# Altium PCB HeatMapNodeV1.PcbDoc
Units mil, origin at the board's own origin, x right, y up, seen from the top; angles counter-clockwise.
Board outline 1650 x 1800 mil, 4 copper layers (Top Layer, Internal Layer 1, Internal Layer 2, Bottom Layer), stack 30.668 mil thick; 33 components, 30 nets, 122 pads, 34 vias.
Unrouted connection lines stored in the file: 1.
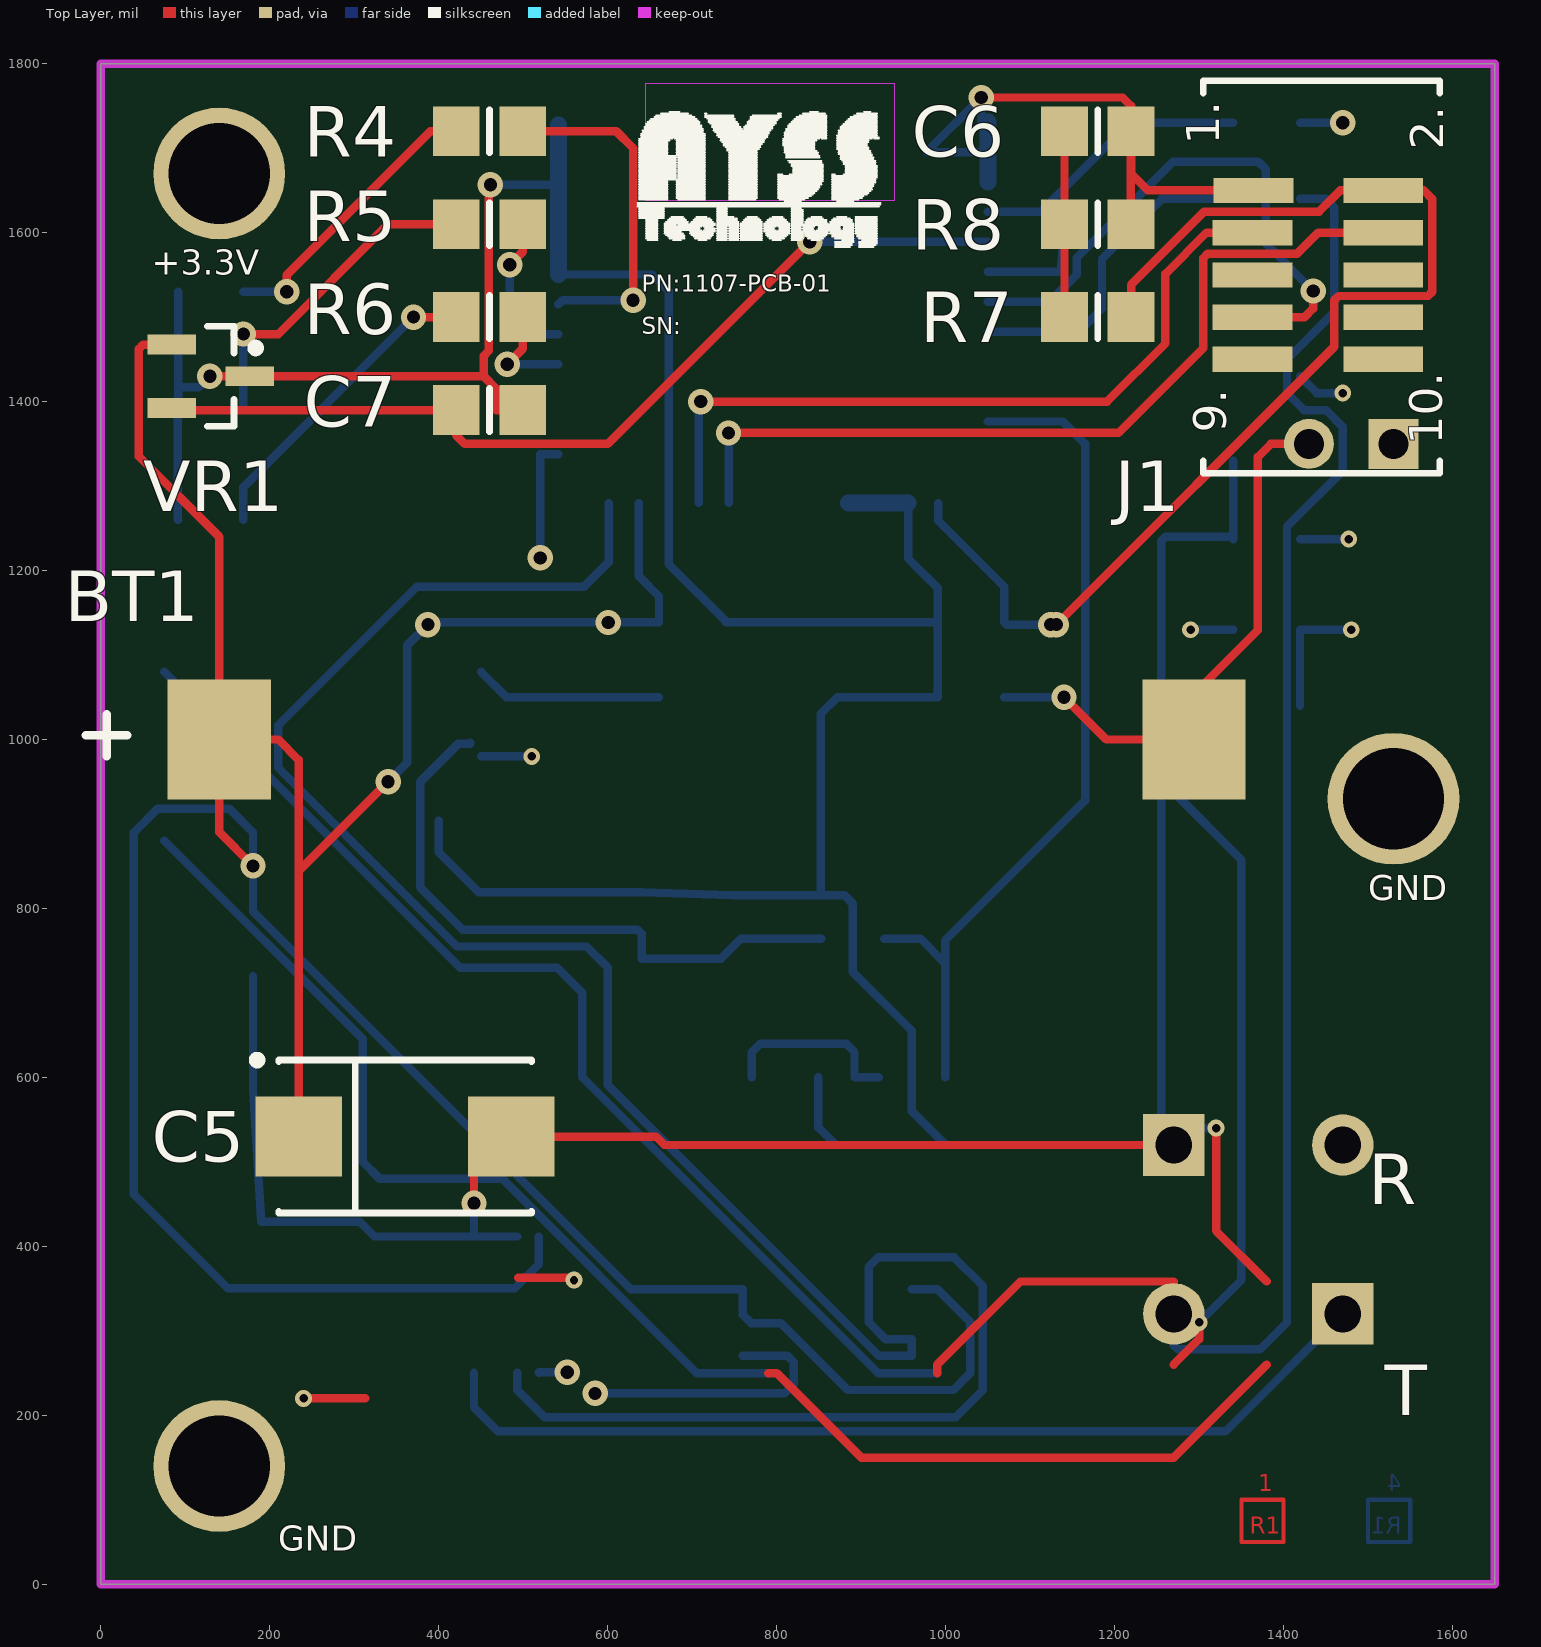
[diagram p0: Top Layer view]
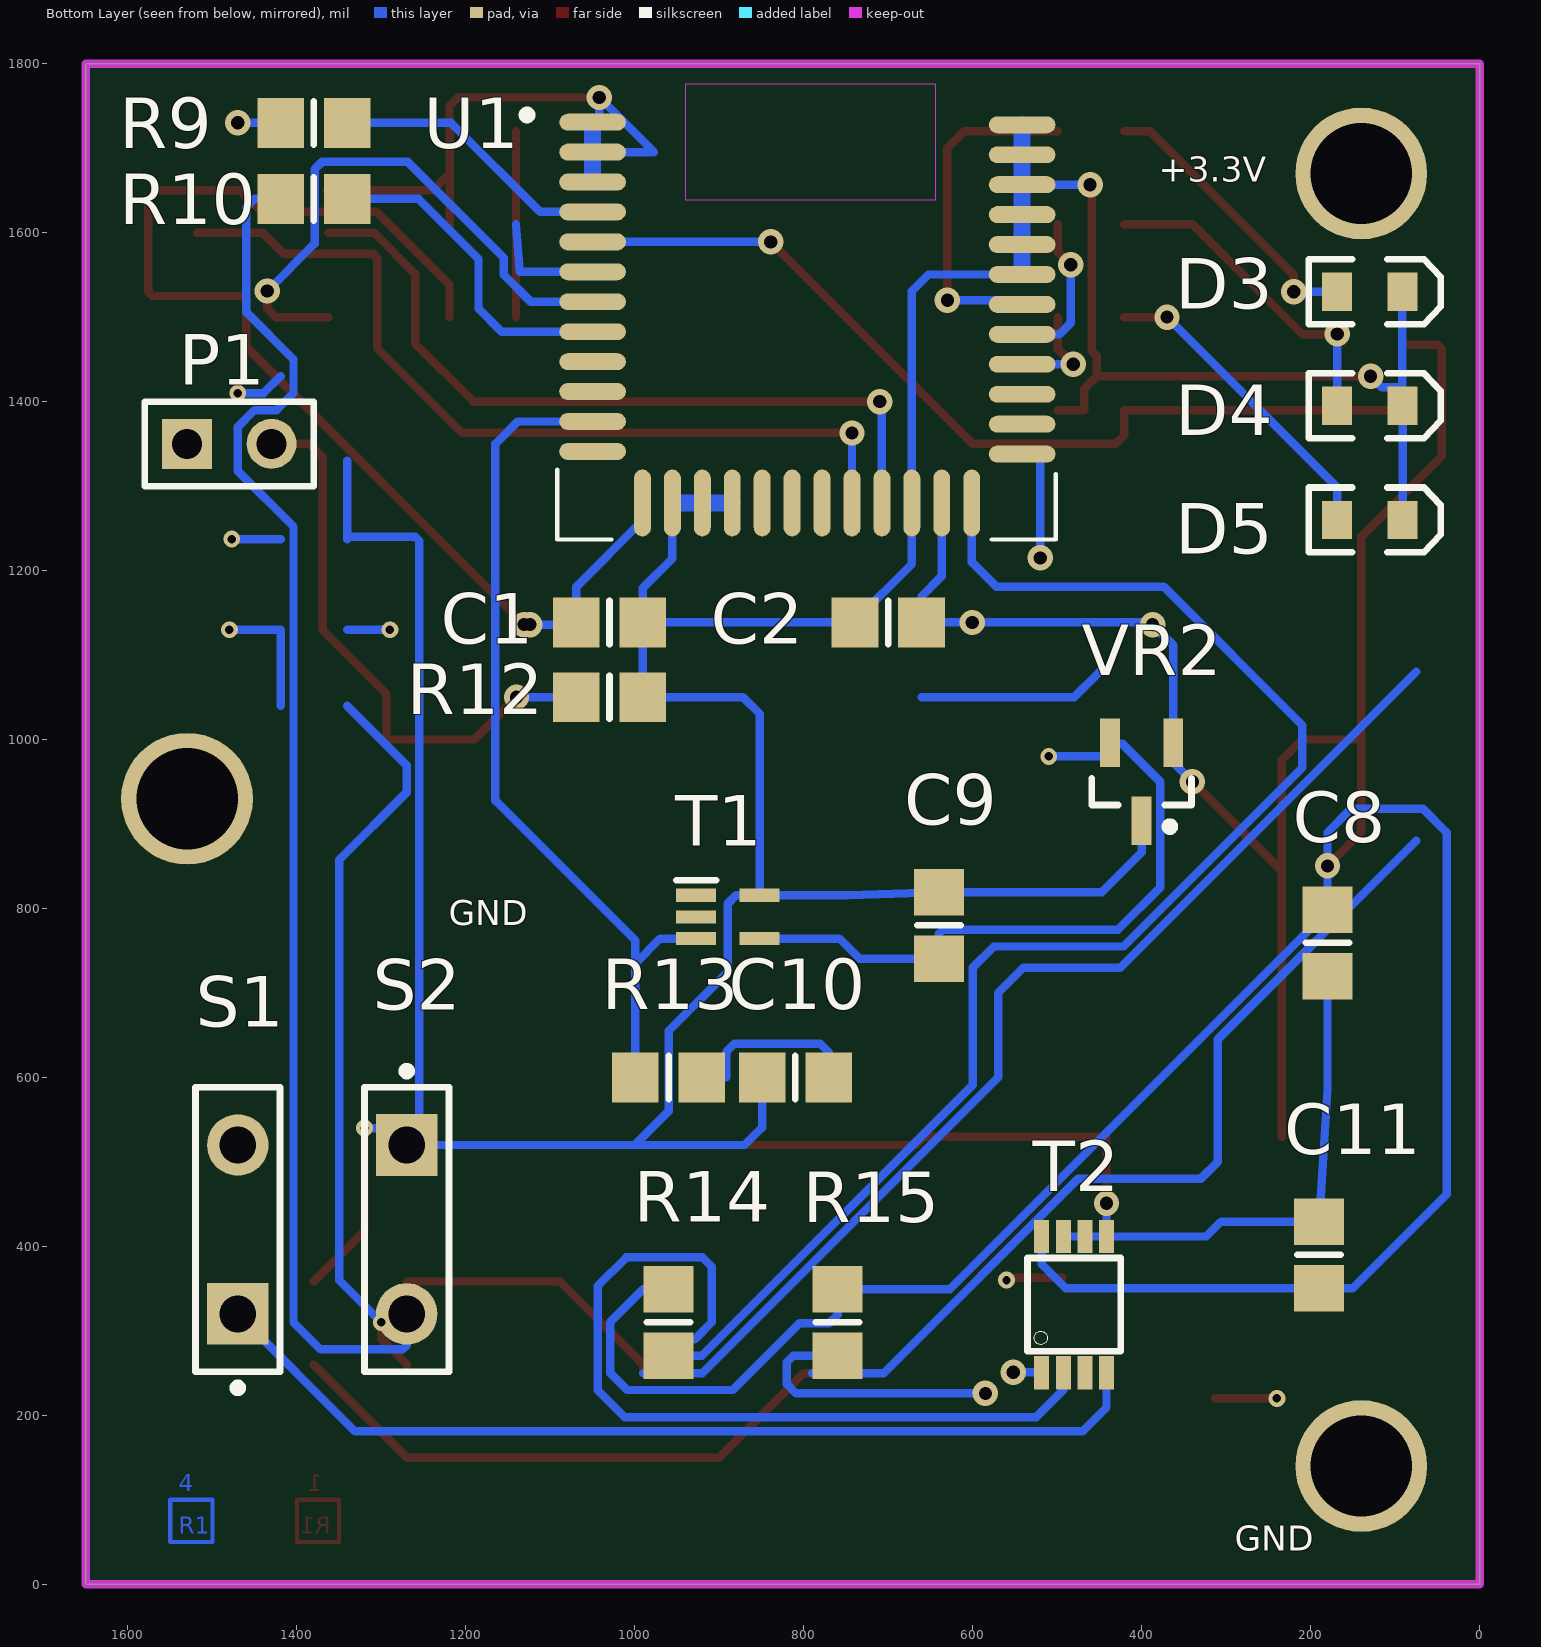
[diagram p1: Bottom Layer view, seen from below]
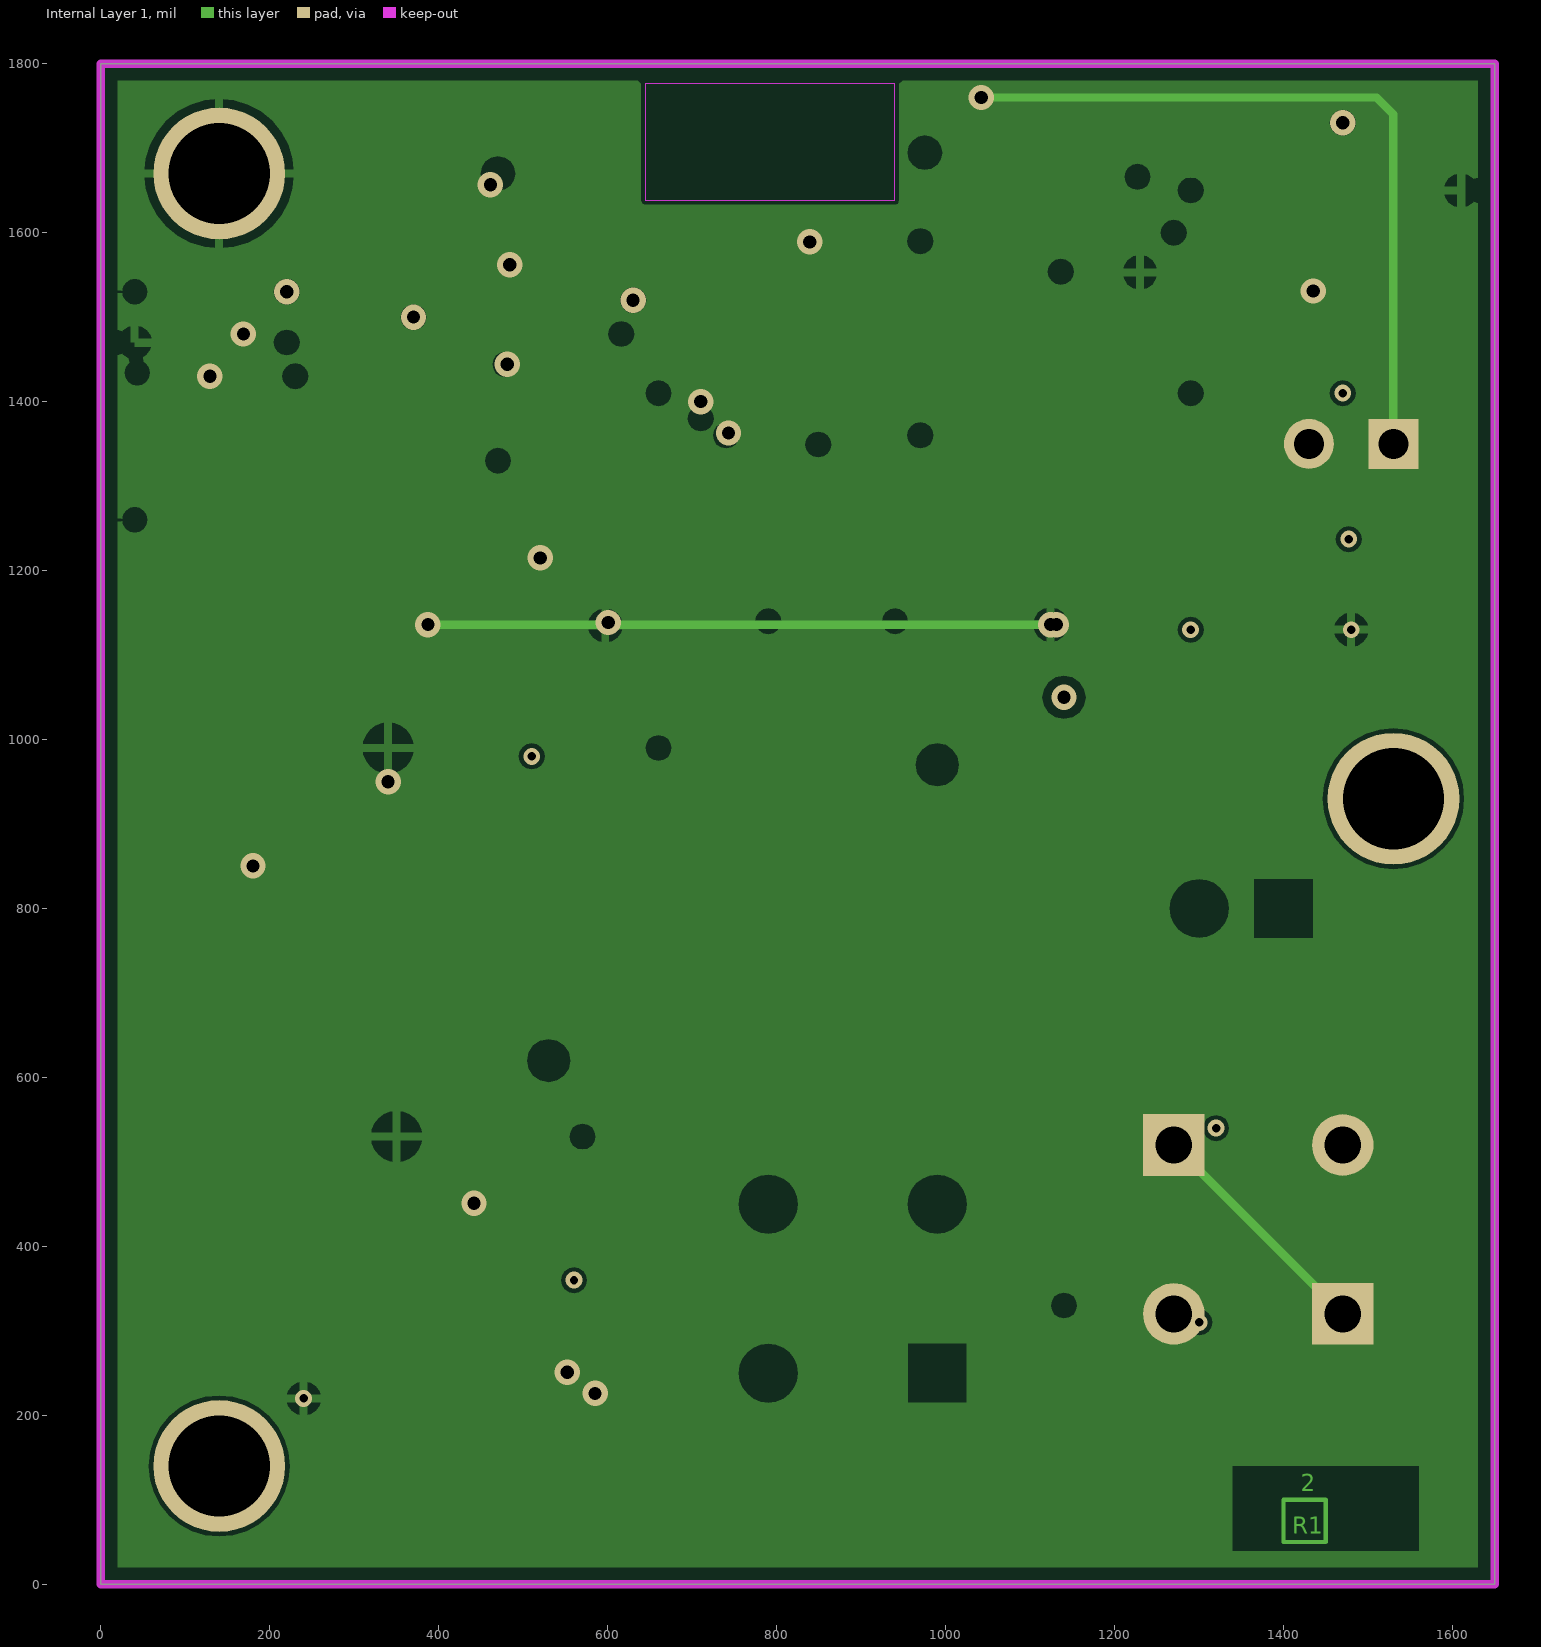
[diagram p2: Internal Layer 1]
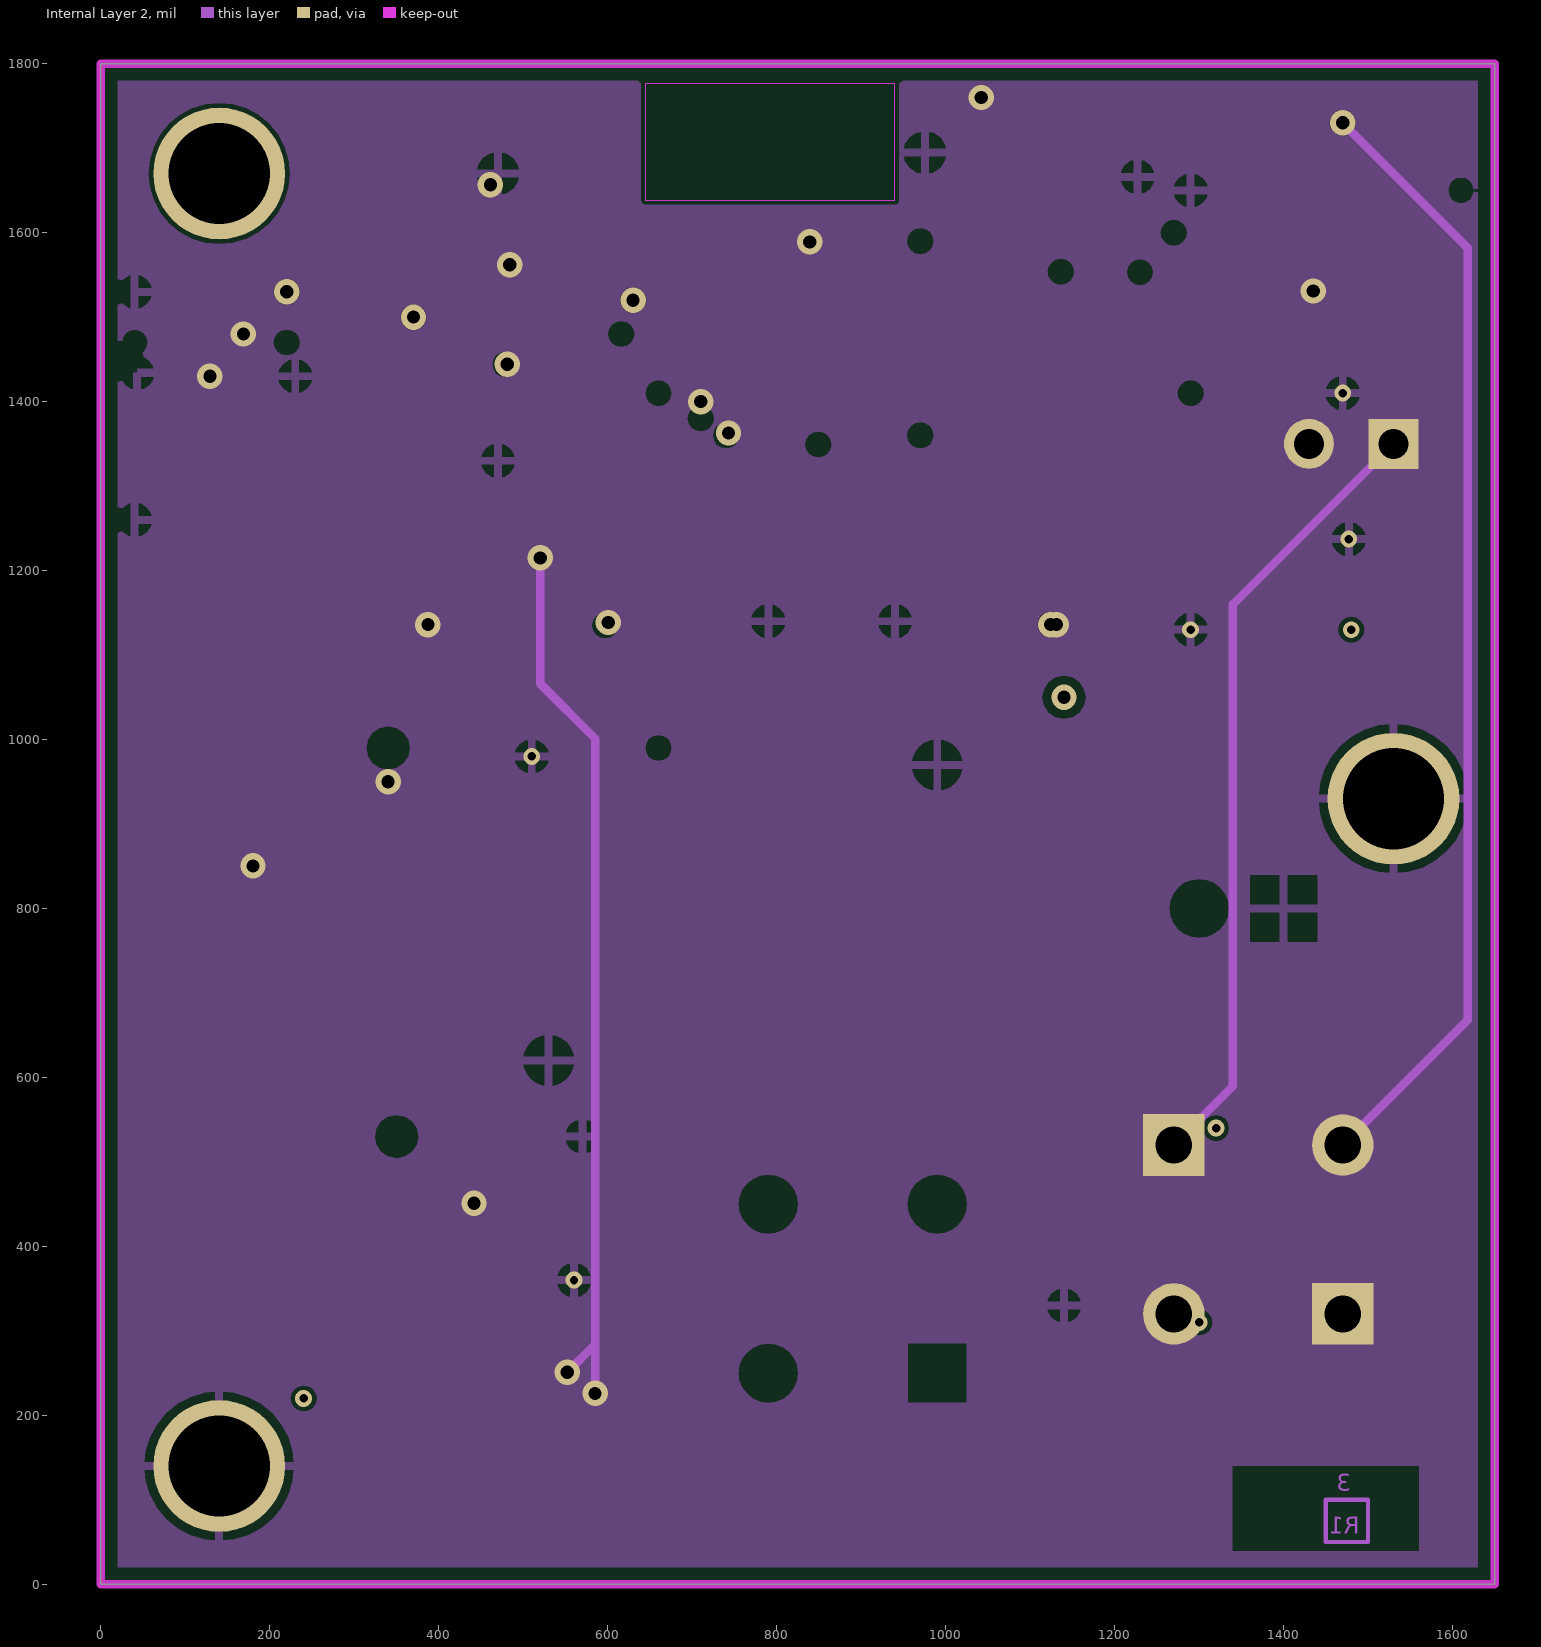
[diagram p3: Internal Layer 2]

## Layer stack, top to bottom
Top Solder: solder mask 0.4, Solder Resist, Dk 3.5
Top Layer: signal copper 1.417
Dielectric 1: core 10, FR-4, Dk 4.2
Internal Layer 1: signal copper 1.417
Dielectric 5: prepreg 5, Dk 4.2
Internal Layer 2: signal copper 1.417
Dielectric 4: core 10, Dk 4.2
Bottom Layer: signal copper 1.417
Bottom Solder: solder mask 0.4, Solder Resist, Dk 3.5

## Board outline
0,0 0,1800 1650,1800 1650,0

## Design rules (kind name [scope] priority, off if disabled: settings)
AssemblyTestPointUsage [(InNet('GND') OR InNet('VDD'))] p1 off: allowmultiple=TRUE
AssemblyTestpoint [All] p1 off: testpointundercomponent=TRUE minsize=40 maxsize=250 preferedsize=60 minholesize=0 maxholesize=150 preferedholesize=32 testpointgrid=1 usegrid=TRUE gridtolerance=0.01 allowsidetop=TRUE allowsidebottom=TRUE
Clearance [All] p1: gap=5 ignorepadtopadclearanceinfootprint=FALSE except(0: Arc-Hole Track-Hole SMDPad-Hole THPad-Hole Via-Hole Fill-Hole Poly-Hole Region-Hole Text-Hole)
DiffPairsRouting [All] p1: maxlimit=15 minlimit=5 mostfreqgap=10 toplayer_minwidth=5 toplayer_maxwidth=15 toplayer_prefwidth=10 midlayer1_minwidth=5 midlayer1_maxwidth=15 midlayer1_prefwidth=10 midlayer2_minwidth=5 midlayer2_maxwidth=15 midlayer2_prefwidth=10 bottomlayer_minwidth=5 bottomlayer_maxwidth=15 bottomlayer_prefwidth=10 maxuncoupledlength=500
FabricationTestPointUsage [(InNet('GND') OR InNet('VDD'))] p1: valid=0 allowmultiple=TRUE
FabricationTestpoint [All] p1: side=3 testpointundercomponent=TRUE minsize=40 maxsize=250 preferedsize=100 minholesize=0 maxholesize=250 preferedholesize=32 testpointgrid=1 allowsidetop=TRUE allowsidebottom=TRUE usegrid=TRUE gridtolerance=0.01
HoleSize [All] p1: absolutevalues=TRUE maxlimit=1000 minlimit=10 maxpercent=80.000 minpercent=20.000
MinimumSolderMaskSliver [All] p1: minsoldermaskwidth=5
PolygonConnect [All] p1: connectstyle=Relief reliefconductorwidth=10 reliefentries=4 polygonreliefangle="90 Angle" airgapwidth=10
RoomDefinition HeatMapNodeV1 [InComponentClass('HeatMapNodeV1')] p1: confinementstyle=ConfineIn formatcopy=TRUE lockcomponents=FALSE outline 1690,60 3670,60 3670,380 1690,380
RoutingVias [All] p1: holewidth=15.6 width=30 viastyle="Through Hole" minholewidth=10 minwidth=20 maxholewidth=31.3 maxwidth=50
SilkToSolderMaskClearance [IsPad] p1: minsilkscreentomaskgap=5 clearancetoexposedcopper=TRUE
SolderMaskExpansion "Via solder mask" [IsVia] p1: expansion=-100 // Solder mask for the vias
SolderMaskExpansion [All] p2: expansion=4
Width [All] p1: maxlimit=20 minlimit=5 preferedwidth=10
22 further rules are at their usual default settings.

## Components (designator, comment, footprint, x,y, rotation, side; value= is the part's Value field where it differs from the comment)
BT1 "1060" 1060 716.97,1000 r180 top
C1 "Cap Semi" 6-0805_M 1030,1138.57 r0 bottom value=0.10µF
C2 "Cap Semi" 6-0805_M 700,1138.57 r180 bottom value=0.10µF
C5 "Cap Pol3" D 360,530 r0 top value=100µF
C6 "Cap Semi" 6-0805_M 1180,1720 r180 top value=0.10µF
C7 "Cap Semi" 6-0805_M 460,1390 r180 top value=0.10µF
C8 "Cap Semi" 6-0805_M 180,759.37 r90 bottom value=0.10µF
C9 "Cap Semi" 6-0805_M 640,780 r270 bottom value=0.10µF
C10 "Cap Semi" 6-0805_M 810,600 r180 bottom value=1µF
C11 "Cap Semi" 6-0805_M 190,390 r270 bottom value=0.01µF
D3 "LED2" 2.0X1.25X1.2 130,1530 r180 bottom
D4 "LED2" 2.0X1.25X1.2 130,1395 r180 bottom
D5 "LED2" 2.0X1.25X1.2 130,1260 r180 bottom
J1 "Header 5X2" HDR2X5_SMD_127 1440,1550 r90 top
P1 "Header 2" HDR1X2 1530,1350 r180 bottom
R4 "Res1" 6-0805_M 460,1720 r180 top value=680
R5 "Res1" 6-0805_M 460,1610 r180 top value=680
R6 "Res1" 6-0805_M 460,1500 r180 top value=680
R7 "Res1" 6-0805_M 1180,1500 r0 top value=10K
R8 "Res1" 6-0805_M 1180,1610 r180 top value=10K
R9 "Res1" 6-0805_M 1380,1730 r0 bottom value=680
R10 "Res1" 6-0805_M 1380,1640 r0 bottom value=680
R12 "Res1" 6-0805_M 1030,1050 r180 bottom value=1k
R13 "Res1" 6-0805_M 960,600 r180 bottom value=200
R14 "Res1" 6-0805_M 960,310 r270 bottom value=10K
R15 "Res1" 6-0805_M 760,310 r270 bottom value=10K
S1 "SW-PB" SPST-2 1470,420 r90 bottom
S2 "SW-PB" SPST-2 1270,420 r270 bottom
T1 "STLM20W87F" SOT65P210X110-5N 890,790 r180 bottom
T2 "TMP75" MSOP8 480,331 r180 bottom
U1 "BLE121LR module" BLE121LR 1050,1280 r180 bottom
VR1 "Volt Reg" SOT23_M 130,1430 r0 top
VR2 "Volt Reg" SOT23_M 400,950 r270 bottom

## Footprints (in the part's own frame and the unit in brackets; to place one, negate y for a bottom-side part, rotate by r counter-clockwise, add the part's x,y. Pads: shape width x height; smd on the part's side, far side on the other; paste and mask are expansions set on the pad)
2.0X1.25X1.2 [mm] "SM LED; 2 Flat Leads"
  rect 0.9x1.15 smd: 1(-0.98,0) 2(0.98,0)
  silkscreen extent -1.83,-0.97 2.13,0.98
6-0805_M [mm] "Chip Resistor, Body 2.0x1.2mm, IPC Low Density"
  rect 1.4x1.5 smd: 1(-1,0) 2(1,0)
  silkscreen extent 0,-0.65 0,0.65, body extent -1.07,-0.7 1.07,0.7, height 0.7
1060 [mm] "SMT HOLDER FOR 2032 CELL T&R"
  rect 3.108x3.61 smd: 1(-14.655,0) 2(14.655,0)
  silkscreen extent 17.42,-0.76 18.67,0.51, body extent -15.91,-8.06 15.92,7.94, height 6.02
BLE121LR [mil]
  oval 79x20 smd: 1(0,450.79) 2(0,415.35) 3(0,379.92) 4(0,344.49) 5(0,309.05) 6(0,273.62) 7(0,238.19) 8(0,202.76) 9(0,167.32) 10(0,131.89) 11(0,96.46) 12(0,61.02) 25(508.44,57.89) 26(508.44,93.33) 27(508.44,128.76) 28(508.44,164.19) 29(508.44,199.63) 30(508.44,235.06) 31(508.44,270.49) 32(508.44,305.92) 33(508.44,341.36) 34(508.44,376.79) 35(508.44,412.22) 36(508.44,447.66)
  oval 20x79 smd: 13(59.06,0) 14(94.49,0) 15(129.92,0) 16(165.35,0) 17(200.79,0) 18(236.22,0) 19(271.65,0) 20(307.09,0) 21(342.52,0) 22(377.95,0) 23(413.39,0) 24(448.82,0)
  Multi-Layer keep-out region: 110.24,496.06 405.51,496.06 405.51,358.26 110.24,358.26
  silkscreen extent -83,-43 548,464, body extent -30,-31 539,500, height 71
D [mm] "Capacitor, SM Tantalum; Body 7.3 x 4.3 mm (LxW typ)"
  rect 2.6x2.4 smd: 1(-3.2,0) 2(3.2,0)
  silkscreen extent -4.57,-2.3 3.8,2.42
HDR1X2 [mm] "Connector; Header; 2 Position"
  rect 1.5x1.5 hole 0.9: 1(0,0)
  round 1.5 hole 0.9: 2(2.54,0)
  silkscreen extent -1.27,-1.27 3.81,1.27
HDR2X5_SMD_127 [mm] "10 Positions Header, Shrouded Connector 0.050\" (1.27mm) Surface Mount Gold"
  rect 0.76x2.4 smd: 1(2.54,1.919) 2(2.54,-1.981) 3(1.27,1.956) 4(1.27,-1.981) 5(0,1.956) 6(0,-1.981) 7(-1.27,1.956) 8(-1.27,-1.981) 9(-2.54,1.956) 10(-2.54,-1.981)
  silkscreen extent -5.97,-3.68 5.84,3.43, body extent -5.46,-2.41 5.44,2.54, height 5.4
MSOP8 [mm]
  rect 0.45x1 smd: 1(-0.975,-2.05) 2(-0.325,-2.05) 3(0.325,-2.05) 4(0.975,-2.05) 5(0.975,2.05) 6(0.325,2.05) 7(-0.325,2.05) 8(-0.975,2.05)
  silkscreen extent -1.4,-1.4 1.4,1.4
SOT23_M [mm] "SOT23, 3-Leads, Body 2.9x1.3mm, Pitch 0.95mm, Lead Span 2.3mm - Reverse Pinning, IPC Low Density"
  rect 1.45x0.6 smd: 1(1.175,0) 2(-1.175,-0.95) 3(-1.175,0.95)
  silkscreen extent -0.1,-1.5 1.48,1.5, body extent -0.7,-1.5 0.7,1.5, height 1.1
SOT65P210X110-5N [mm]
  rect 1.2x0.4 smd: 1(-0.95,0.65) 2(-0.95,0) 3(-0.95,-0.65) 4(0.95,-0.65) 5(0.95,0.65)
  silkscreen extent -1.55,1.1 -0.35,1.1
SPST-2 [mm] "Switch; 2 Leads"
  rect 1.85x1.85 hole 1.1: 1(-2.54,0)
  round 1.85 hole 1.1: 2(2.54,0)
  silkscreen extent -4.89,-1.27 4.28,1.27

## Part data
BT1: library part Battery, "Coin Cell Battery 2032 Holder", Manufacturer="Keystone Electronics", Operating Temperature="-50°C ~ 145°C", Supplier Part Number 1=36-1060-ND, Battery Cell Size="Coin, 20.0mm", Battery Series=2032, Battery Type, Function="Coin Cell, Holder", Category="Battery Products", ComponentLink1Description=http://www.keyelco.com/product-pdf.cfm?p=726, ComponentLink1URL=http://www.keyelco.com/product-pdf.cfm?p=726, Height Above Board="0.217\" (5.50mm)", Manufacturer Part Number=1060, Mounting Type="PCB, Surface Mount", Number of Cells=1, Part Status=Active, Pricing 1="1=1.79, 10=1.475, 50=1.3244, 100=1.2642, 250=1.1438, 500=1.0535, 1000=1.01202, 2500=0.903, 5000=0.80066 (USD)", RoHS="RoHS Compliant", Stock 1=5034, Style="Holder (Open)", Supplier 1=Digi-Key, Termination Style="SMD (SMT) Tab"
C1 C2 C6 C7 C8 C9 C10 C11: "Capacitor (Semiconductor SIM Model)", Capacitance=0.10µF, Manufacturer="Taiyo Yuden", Manufacturer Part Number=HMK212B7104KG-T, Operating Temperature="-55°C ~ 125°C", Package / Case="0805 (2012 Metric)", Ratings=-, Supplier Part Number 1=587-1276-1-ND, Temperature Coefficient=X7R, Tolerance=±10%, Voltage - Rated=100V, Applications="General Purpose", Category=Capacitors, ComponentLink1Description=http://ds.yuden.co.jp/TYCOMPAS/ut/detail.do?productNo=HMK212B7104KG-T&fileName=HMK212B7104KG-T_SS&mode=specSheetDownload, ComponentLink1URL=http://ds.yuden.co.jp/TYCOMPAS/ut/detail.do?productNo=HMK212B7104KG-T&fileName=HMK212B7104KG-T_SS&mode=specSheetDownload, Features="High Voltage", Height - Seated (Max)=-, LatestRevisionDate=29-May-2009, LatestRevisionNote="IPC-7351 Footprint Added.", Lead Spacing=-, Lead Style=-, Mounting Type="Surface Mount, MLCC", PackageDescription="Chip Capacitor", Packaging="Cut Tape (CT)", Part Status=Active, Pricing 1="1=0.19, 10=0.128, 25=0.0936, 50=0.0766, 100=0.0647, 250=0.05276, 500=0.04426, 1000=0.03915 (USD)", Published=8-Jun-2000, Publisher="Altium Limited", RoHS="RoHS Compliant", Size / Dimension="0.079\" L x 0.049\" W (2.00mm x 1.25mm)", Stock 1=4553, Supplier 1=Digi-Key, Thickness (Max)="0.053\" (1.35mm)"
C5: "Polarized Capacitor (Surface Mount)", Capacitance=100µF, ESR (Equivalent Series Resistance)="125 mOhm", Lifetime @ Temp.="2000 Hrs @ 85°C", Manufacturer=KEMET, Manufacturer Part Number=T495D107K016ATE125, Manufacturer Size Code=D, Operating Temperature="-55°C ~ 125°C", Package / Case="2917 (7343 Metric)", Supplier Part Number 1=399-8499-1-ND, Tolerance=±10%, Voltage - Rated=16V, Category=Capacitors, ComponentLink1Description=http://www.kemet.com/docfinder?Partnumber=T495D107K016ATE125, ComponentLink1URL=http://www.kemet.com/docfinder?Partnumber=T495D107K016ATE125, Failure Rate=-, Features="General Purpose", Height - Seated (Max)="0.122\" (3.10mm)", LatestRevisionDate=29-May-2009, LatestRevisionNote="IPC-7351 Footprint Added.", Lead Spacing=-, Mounting Type="Surface Mount", PackageDescription="Chip Capacitor", PackageReference=C0805, Packaging="Cut Tape (CT)", Part Status=Active, Pricing 1="1=1.37, 10=1.084, 25=0.9936, 50=0.9394, 100=0.8129, 250=0.72264 (USD)", Published=8-Jun-2000, Publisher="Altium Limited", RoHS="RoHS Compliant", Size / Dimension="0.287\" L x 0.169\" W (7.30mm x 4.30mm)", Stock 1=19470, Supplier 1=Digi-Key, Type=Molded
D3: "Typical RED, GREEN, YELLOW, AMBER GaAs LED", Color=Green, Current - Test=20mA, Manufacturer="Visual Communications Company - VCC", Manufacturer Part Number=CMD17-21VGD/TR8, Millicandela Rating=7mcd, Package / Case="0805 (2012 Metric)", Supplier Device Package=0805, Supplier Part Number 1=L62505CT-ND, Voltage - Forward (Vf) (Typ)=2.1V, Category=Optoelectronics, ComponentLink1Description=http://vcclite.com/_pdf/CMD17-21%20Series%20SMT%20LEDs%200805%20Package%20Size.pdf, ComponentLink1URL=http://vcclite.com/_pdf/CMD17-21%20Series%20SMT%20LEDs%200805%20Package%20Size.pdf, Features=-, Height (Max)=1.20mm, Lens Color=Green, Lens Style/Size="Rectangle with Flat Top, 1.40mm x 1.25mm", Lens Transparency=Diffused, Mounting Type="Surface Mount", Packaging="Cut Tape (CT)", Part Status=Active, Pricing 1="1=0.5, 10=0.364, 25=0.2972, 100=0.2376, 250=0.20048, 500=0.17078, 1000=0.13365 (USD)", RoHS="RoHS Compliant", Size / Dimension="2.00mm L x 1.25mm W", Stock 1=21325, Supplier 1=Digi-Key, Viewing Angle=140°, Wavelength - Dominant=-, Wavelength - Peak=570nm
D4: "Typical RED, GREEN, YELLOW, AMBER GaAs LED", Color=Red, Current - Test=20mA, Manufacturer="Visual Communications Company - VCC", Manufacturer Part Number=CMD17-21VRD/TR8, Millicandela Rating=6mcd, Package / Case="0805 (2012 Metric)", Supplier Device Package=0805, Supplier Part Number 1=L62501CT-ND, Voltage - Forward (Vf) (Typ)=2V, Category=Optoelectronics, ComponentLink1Description=http://vcclite.com/_pdf/CMD17-21%20Series%20SMT%20LEDs%200805%20Package%20Size.pdf, ComponentLink1URL=http://vcclite.com/_pdf/CMD17-21%20Series%20SMT%20LEDs%200805%20Package%20Size.pdf, Features=-, Height (Max)=1.20mm, Lens Color=Red, Lens Style/Size="Rectangle with Flat Top, 1.40mm x 1.25mm", Lens Transparency=Diffused, Mounting Type="Surface Mount", Packaging="Cut Tape (CT)", Part Status=Active, Pricing 1="1=0.54, 10=0.388, 25=0.3168, 100=0.2534, 250=0.21384, 500=0.18216, 1000=0.14256 (USD)", RoHS="RoHS Compliant", Size / Dimension="2.00mm L x 1.25mm W", Stock 1=24797, Supplier 1=Digi-Key, Viewing Angle=140°, Wavelength - Dominant=-, Wavelength - Peak=640nm
D5: "Typical RED, GREEN, YELLOW, AMBER GaAs LED", Color=Yellow, Current - Test=20mA, Manufacturer="Visual Communications Company - VCC", Manufacturer Part Number=CMD17-21VYD/TR8, Millicandela Rating=4mcd, Package / Case="0805 (2012 Metric)", Supplier Device Package=0805, Supplier Part Number 1=L62507CT-ND, Voltage - Forward (Vf) (Typ)=2V, Category=Optoelectronics, ComponentLink1Description=http://vcclite.com/_pdf/CMD17-21%20Series%20SMT%20LEDs%200805%20Package%20Size.pdf, ComponentLink1URL=http://vcclite.com/_pdf/CMD17-21%20Series%20SMT%20LEDs%200805%20Package%20Size.pdf, Features=-, Height (Max)=1.20mm, Lens Color=Yellow, Lens Style/Size="Rectangle with Flat Top, 1.40mm x 1.25mm", Lens Transparency=Diffused, Mounting Type="Surface Mount", Packaging="Cut Tape (CT)", Part Status=Active, Pricing 1="1=0.61, 10=0.437, 25=0.3564, 100=0.2851, 250=0.24056, 500=0.20494, 1000=0.16038 (USD)", RoHS="RoHS Compliant", Size / Dimension="2.00mm L x 1.25mm W", Stock 1=10342, Supplier 1=Digi-Key, Viewing Angle=140°, Wavelength - Dominant=-, Wavelength - Peak=585nm
J1: "Header, 5-Pin, Dual row", Color=Black, Manufacturer="Amphenol FCI", Manufacturer Part Number=20021521-00010T1LF, Supplier Part Number 1=609-4054-ND, Category="Connectors, Interconnects", ComponentLink1Description=http://portal.fciconnect.com/Comergent//fci/drawing/20021521.pdf, ComponentLink1URL=http://portal.fciconnect.com/Comergent//fci/drawing/20021521.pdf, Connector Type="Header, Shrouded", Contact Finish=Gold, Contact Finish Thickness=Flash, Contact Mating Length=-, Contact Type="Male Pin", Fastening Type=-, Features=-, LatestRevisionDate=17-Jul-2002, LatestRevisionNote="Re-released for DXP Platform.", Mounting Type="Surface Mount", Number of Positions=10, Number of Positions Loaded=All, Number of Rows=2, Packaging=Tube, Part Status=Active, Pitch="0.050\" (1.27mm)", Pricing 1="1=1.11, 10=0.973, 100=0.8393, 500=0.6867, 1000=0.6104, 5000=0.5341, 10000=0.5074 (USD)", Publisher="Altium Limited", RoHS="RoHS Compliant", Row Spacing="0.050\" (1.27mm)", Stock 1=34633, Supplier 1=Digi-Key, Termination=Solder
P1: "Header, 2-Pin"
R4 R5 R6 R9 R10 R13 R14 R15: "Resistor", Manufacturer="Vishay Dale", Manufacturer Part Number=CRCW0805680RFKEA, Operating Temperature="-55°C ~ 155°C", Package / Case="0805 (2012 Metric)", Power (Watts)="0.125W, 1/8W", Resistance (Ohms)=680, Supplier Device Package=0805, Supplier Part Number 1=541-680CCT-ND, Temperature Coefficient=±100ppm/°C, Tolerance=±1%, Category=Resistors, ComponentLink1Description=http://www.vishay.com/docs/20035/dcrcwe3.pdf, ComponentLink1URL=http://www.vishay.com/docs/20035/dcrcwe3.pdf, Composition="Thick Film", Failure Rate=-, Features="Automotive AEC-Q200", Height - Seated (Max)="0.020\" (0.50mm)", Number of Terminations=2, Packaging="Cut Tape (CT)", Part Status=Active, Pricing 1="1=0.1, 10=0.04, 25=0.0288, 50=0.022, 100=0.0162, 250=0.01236, 500=0.0099, 1000=0.00729 (USD)", RoHS="RoHS Compliant", Size / Dimension="0.079\" L x 0.049\" W (2.00mm x 1.25mm)", Stock 1=37773, Supplier 1=Digi-Key
R7 R8: "Resistor", Manufacturer="Vishay Dale", Manufacturer Part Number=CRCW080510K0FKEA, Operating Temperature="-55°C ~ 155°C", Package / Case="0805 (2012 Metric)", Power (Watts)="0.125W, 1/8W", Resistance (Ohms)=10k, Supplier Device Package=0805, Supplier Part Number 1=541-10.0KCCT-ND, Temperature Coefficient=±100ppm/°C, Tolerance=±1%, Category=Resistors, ComponentLink1Description=http://www.vishay.com/docs/20035/dcrcwe3.pdf, ComponentLink1URL=http://www.vishay.com/docs/20035/dcrcwe3.pdf, Composition="Thick Film", Failure Rate=-, Features="Automotive AEC-Q200", Height - Seated (Max)="0.020\" (0.50mm)", Number of Terminations=2, Packaging="Cut Tape (CT)", Part Status=Active, Pricing 1="1=0.1, 10=0.04, 25=0.0288, 50=0.022, 100=0.0162, 250=0.01236, 500=0.0099, 1000=0.00729 (USD)", RoHS="RoHS Compliant", Size / Dimension="0.079\" L x 0.049\" W (2.00mm x 1.25mm)", Stock 1=531677, Supplier 1=Digi-Key
R12: "Resistor", Manufacturer="Vishay Dale", Manufacturer Part Number=CRCW08050000Z0EA, Operating Temperature="-55°C ~ 155°C", Package / Case="0805 (2012 Metric)", Power (Watts)="0.125W, 1/8W", Resistance (Ohms)=0.0, Supplier Device Package=0805, Supplier Part Number 1=541-0.0ACT-ND, Temperature Coefficient=-, Tolerance=Jumper, Category=Resistors, ComponentLink1Description=http://www.vishay.com/docs/20035/dcrcwe3.pdf, ComponentLink1URL=http://www.vishay.com/docs/20035/dcrcwe3.pdf, Composition="Thick Film", Failure Rate=-, Features="Automotive AEC-Q200", Height - Seated (Max)="0.020\" (0.50mm)", Packaging="Cut Tape (CT)", Part Status=Active, Pricing 1="1=0.1, 10=0.026, 25=0.0184, 50=0.014, 100=0.0104, 250=0.00792, 500=0.00634, 1000=0.00466 (USD)", RoHS="RoHS Compliant", Size / Dimension="0.079\" L x 0.049\" W (2.00mm x 1.25mm)", Stock 1=1246099, Supplier 1=Digi-Key
S1 S2: "Switch", LatestRevisionDate=17-Jul-2002, LatestRevisionNote="Re-released for DXP Platform.", PackageDescription="Switch; 2 Leads", PackageReference=SPST-2, Published=24-Mar-1999, Publisher="Altium Limited"
T1: "STLM20W87F, Temperature Sensor 1.5C 2.4 to 5.5V 5-Pin SOT-323", Manufacturer_Name=STMicroelectronics, RS Part Number=1685835, Allied_Number=70390883, Allied Price/Stock=http://www.alliedelec.com/stmicroelectronics-stlm20w87f/70390883/, Arrow Part Number=STLM20W87F, Arrow Price/Stock=https://www.arrow.com/en/products/stlm20w87f/stmicroelectronics, Datasheet Link=http://www.st.com/st-web-ui/static/active/en/resource/technical/document/datasheet/CD00119601.pdf, Geometry.Height=1.1mm, Manufacturer_Part_Number=STLM20W87F, RS Price/Stock=http://uk.rs-online.com/web/p/products/1685835
T2: "the tmp175 and tmp75 are two-wire serial output temperature sensors available in so-8 and msop-8 packages. requiring ...", Package=None, Availability=Unavailable, MF="Texas Instruments", MP=TMP75, Price=None, SnapEDA_Link=https://www.snapeda.com/parts/TMP75/Texas%2520Instruments/view-part/?ref=snap
U1: library part BLE121LR, "Bluetooth Low Energy (BLE) module", Current - Receiving="28mA ~ 33mA", Current - Transmitting="25mA ~ 39mA", Frequency=2.4GHz, Manufacturer="Silicon Labs", Manufacturer Part Number=BLE121LR-A-M256K, Operating Temperature="-40°C ~ 85°C", Package / Case=Module, Power - Output=8dBm, Supplier Part Number 1=1446-1039-1-ND, Voltage - Supply="2 V ~ 3.6 V", Antenna Type="Integrated, Chip", Category="RF/IF and RFID", ComponentLink1Description=http://media.digikey.com/pdf/Data%20Sheets/BlueGiga%20PDFs/BLE121LR_V1.2.pdf, ComponentLink1URL=http://media.digikey.com/pdf/Data%20Sheets/BlueGiga%20PDFs/BLE121LR_V1.2.pdf, Data Rate=2Mbps, Memory Size="256kB Flash,  8kB SRAM", Modulation=-, Mounting Type="Surface Mount", Packaging="Cut Tape (CT)", Part Status=Active, Pricing 1="1=13.65, 10=12.346, 25=11.3712, 100=10.3965, 250=9.74672, 500=9.09692 (USD)", Protocol="Bluetooth v4.0", RF Family/Standard=Bluetooth, RoHS="RoHS Compliant", Sensitivity=-98dBm, Serial Interfaces="I²C, SPI, UART", Stock 1=4848, Supplier 1=Digi-Key
VR1 VR2: "Voltage Regulator", Current - Cathode=-, Current - Output=5mA, Current - Supply=8.5µA, Manufacturer="Texas Instruments", Manufacturer Part Number=REF3312AIDBZT, Operating Temperature="-40°C ~ 125°C (TA)", Package / Case="TO-236-3, SC-59, SOT-23-3", Supplier Device Package=SOT-23-3, Supplier Part Number 1=296-22635-1-ND, Temperature Coefficient=30ppm/°C, Tolerance=±0.15%, Voltage - Input="1.8 V ~ 5.5 V", Voltage - Output (Min/Fixed)=1.25V, Category="Integrated Circuits (ICs)", ComponentLink1Description=http://www.ti.com/lit/ds/symlink/ref3312.pdf, ComponentLink1URL=http://www.ti.com/lit/ds/symlink/ref3312.pdf, Mounting Type="Surface Mount", Noise - 0.1Hz to 10Hz=35µVp-p, Noise - 10Hz to 10kHz=-, Output Type=Fixed, Packaging="Cut Tape (CT)", Part Status=Active, Pricing 1="1=2.14, 10=1.922, 100=1.5418 (USD)", Reference Type=Series, RoHS="RoHS Compliant", Stock 1=5482, Supplier 1=Digi-Key, Voltage - Output (Max)=-

## Free pads (board coordinates)
  round 156 hole 120: 0(140,140) 0(140,1670) 0(1530,930)

## Via types
v1: diameter 30, hole 15.6, Top Layer to Bottom Layer, 25 vias
v2: diameter 20, hole 10, Top Layer to Bottom Layer, 9 vias

## Nets (pads, with @x,y where several pads share a name; then routed paths per layer and width w, separated by ;. In a path a pad name is that pad's centre, name@x,y a point inside that pad or via, vN(x,y) a via of type N, cw(c..) or ccw(c..) an arc to the next point about the centre after c; other vN are vias at no path point)
DCDC: U1.18
GND: C1.1 C2.1 C5.2 C6.1 C7.1 C8.1 C9.1 C10.1 C11.1 D3.2 D4.2 D5.2 J1.1 P1.1 R8.1 R12.2 S1.1 S2.1 T1.5 T2.4 T2.5 T2.6 T2.7 U1.1 U1.2 U1.3 U1.14 U1.15 U1.16 U1.22 U1.31 U1.32 U1.33 U1.34 U1.35 U1.36 VR1.1 VR2.1 | length 9655.6
  Top Layer w10: v1(129,1430) VR1.1 453.19,1430 ; v1(441.61,451) 441.61,530 C5.2 657,530 667,520 S2.1 ; v1(461,1656.79) 459,1654.79 459,1460 453.19,1454.19 453.19,1430 ; C7.1 468.19,1390 468.19,1415 453.19,1430 ; v1(1042,1760) 1209.37,1760 1219.37,1750 C6.1 ; R8.1 1219,1610 1219,1720 C6.1 ; J1.1 1239.37,1650 1219.37,1670 C6.1
  Internal Layer 2 w10: S2.1 1340,590 1340,1160 P1.1
  Internal Layer 1 w10: v1(1042,1760) 1510,1760 1530,1740 P1.1 ; S2.1 S1.1
  Bottom Layer w10: D5.2 91,1260 91,1389.58 91.42,1390 D4.2 D4.2@91.42,1417 ; D3.2 D4.2@91.42,1417 ; v1(129,1430) 116,1417 D4.2@91.42,1417 ; C8.1 180,585 C11.1 306,429.37 323.66,411.71 T2.5 ; VR2.1 400,866.34 446.97,819.37 C9.1 747.78,815.59 T1.5@852,815.59 ; T2.4 441.61,209.39 470,181 1331,181 S1.1 ; v1(441.61,451) T2.5 ; v1(461,1656.79) U1.34 ; T2.7 T2.6 T2.5 ; U1.31 652.51,1550.49 672.05,1530.95 U1.22 672.05,1207.95 739.37,1140.63 C2.1 C1.1 ; C10.1 849.37,540.63 870,520 1000,520 ; U1.14 955.51,1214.49 990.63,1179.37 C1.1 ; U1.2 977.35,1695.35 v1(1042,1760) 1042,1730.79 U1.1 ; S2.1 1000,520 ; T1.5@852,815.59 852,1030 872,1050 R12.2 C1.1 ; T1.5@852,815.59 T1.5 880,815.59 890,805.59 890,725 960,655 960,560 1000,520
  Bottom Layer w20: U1.31 U1.32 U1.33 U1.34 U1.35 U1.36 ; U1.16 U1.15 U1.14 ; U1.3 U1.2 U1.1
NetBT1_1: BT1.1 P1.2 R12.1 | length 678
  Top Layer w10: v1(1140,1050) 1190,1000 BT1.1 1293.94,1054 1369.56,1129.63 1369.56,1334.56 1385,1350 P1.2
  Bottom Layer w10: R12.1 v1(1140,1050)
NetC9_2: C9.2 T1.4 VR2.2 | length 740.9
  Bottom Layer w10: VR2.2 437.4,995 423,995 378,950 378,825 428,775 635,775 640,770 C9.2 734,740.63 757.78,764.41 T1.4
NetC10_2: C10.2 R13.2 | length 218.3
  Bottom Layer w10: C10.2 770.63,630 780.63,640 882,640 892,630 892,600 R13.2
NetD3_1: D3.1 R4.2 | length 342.5
  Top Layer w10: v1(220,1530) 220,1550 390,1720 R4.2
  Bottom Layer w10: D3.1 v1(220,1530)
NetD4_1: D4.1 R5.2 | length 390.9
  Top Layer w10: v1(168.58,1480) 210,1480 340,1610 R5.2
  Bottom Layer w10: D4.1 v1(168.58,1480)
NetD5_1: D5.1 R6.2 | length 374.1
  Top Layer w10: v1(370,1500) R6.2
  Bottom Layer w10: D5.1 168.58,1298.58 v1(370,1500)
NetR9_2: R9.2 S1.2 | length 1383.2
  Internal Layer 2 w10: S1.2 1618,668 1618,1582 v1(1470,1730)
  Bottom Layer w10: R9.2 v1(1470,1730)
NetR10_2: R10.2 S2.2 | length 1644.2
  Bottom Layer w10: S2.2 1270,283 1275,278 1372,278 1404,310 1404,1252 1470,1318 1470,1370 1450,1390 1424,1390 1404,1410 1404,1450 1460,1506 1460,1630 1450,1640 R10.2
P0_0: C6.2 R7.1 R8.2 U1.6 | length 362.9
  Top Layer w10: R7.1 R8.2 C6.2
  Bottom Layer w10: U1.6 1136.38,1553.62 1140.63,1610
P0_1: C7.2 U1.5 VR1.2 | length 1100.5
  Top Layer w10: VR1.2 86.34,1390 C7.2 420.63,1360 430.63,1350 600,1350 v1(839.05,1589.05)
  Bottom Layer w10: v1(839.05,1589.05) U1.5
P0_2: R9.1 U1.4 | length 334.3
  Bottom Layer w10: U1.4 1112,1624.49 1217.51,1730 R9.1
P0_3: R10.1 U1.8 | length 390.3
  Bottom Layer w10: U1.8 1157.76,1482.76 1185,1510 1185,1569 1256,1640 R10.1
P0_4: U1.9
P0_5: U1.10
P0_6: R13.1 T1.3 U1.11 | length 1028.7
  Bottom Layer w10: T1.3 970,764.41 999.37,735.04 ; R13.1 999.37,735.04 ; U1.11 1138.54,1376.46 1165,1350 1165,927.63 999.37,762 999.37,735.04
P0_7: U1.12
P1_2: R4.1 U1.30 | length 409.4
  Top Layer w10: R4.1 610,1720 630,1700 v1(630,1520)
  Bottom Layer w10: U1.30 546.5,1520 v1(630,1520)
P1_3: R5.1 U1.29 | length 186.5
  Top Layer w10: v1(484,1562) 499.37,1577.37 R5.1
  Bottom Layer w10: v1(484,1562) 484,1493 497.37,1479.63 U1.29
P1_4: R6.1 U1.28 | length 124
  Top Layer w10: v1(481,1444.19) 499.37,1462.56 R6.1
  Bottom Layer w10: v1(481,1444.19) U1.28
P1_5: U1.27
P1_6: U1.17
P2_0: U1.19
P2_1/PROG_DD: J1.4 U1.20 | length 1018.6
  Top Layer w10: v1(742.91,1362.91) 1204.54,1362.91 1305.04,1463.41 1305.04,1570 1310.08,1575.04 1416.04,1575.04 1441,1600 J1.4
  Bottom Layer w10: U1.20 v1(742.91,1362.91)
P2_2/PROG_DC: J1.3 U1.21 | length 905
  Top Layer w10: v1(710,1400) 1191,1400 1260,1469 1260,1551.21 1308.79,1600 J1.3
  Bottom Layer w10: U1.21 707.48,1397.48 v1(710,1400)
RESET: J1.7 U1.7 | length 677.5
  Top Layer w10: J1.7 1425,1500 1435,1510 v1(1435,1531)
  Bottom Layer w10: U1.7 1123.19,1518.19 1155,1550 1155,1570 1269,1684 1370,1684 1379,1675 1379,1587 v1(1435,1531)
SCL: R14.2 T2.2 U1.24 | length 2730.6
  Bottom Layer w10: T2.2 492.79,230 524.79,198 1012,198 1044,230 1044,353 1010,387 920,387 909,376 909,310 929,290 960,290 R14.2 920.58,270.63 600,591.21 600,730 575,755 421.41,755 210,966.41 210,1017.08 373.92,1181 572.18,1181 601.18,1210 U1.24
SDA: R15.2 T2.1 U1.25 | length 1570.1
  Internal Layer 2 w10: v1(520,1215) 520,1066 585,1001 585,284 ; v1(552,251) 585,284 ; v1(585,226) 585,284
  Bottom Layer w10: T2.1 518.39,251 v1(552,251) ; v1(520,1215) 520,1337.89 U1.25 ; v1(585,226) 809,226 820,237 820,263 812.37,270.63 R15.2
VDD: BT1.2 C1.2 C2.2 C5.1 C8.2 C11.2 J1.2 R7.2 R14.1 R15.1 T2.8 U1.13 U1.23 VR1.3 VR2.3 | length 6759
  Top Layer w10: VR1.3 50,1467.4 45,1462.4 45,1335 140,1240 BT1.2 ; v1(180,850.41) 140,890.41 BT1.2 ; C5.1 234.02,844.02 ; v1(340,950) 234.02,844.02 ; v1(1131,1136) 1460,1465 1460,1520 1465,1525 1571,1525 1576,1530 1576,1640 1566,1650 J1.2 1467,1650 1442,1625 1306,1625 1219.37,1538.37 R7.2 ; BT1.2 210,1000 234.02,975.98 234.02,844.02
  Internal Layer 1 w10: v1(387,1136) v1@603.14,1136 ; v1(600.57,1138.57) v1@603.14,1136 ; v1(1131,1136) v1(1124,1136) v1@603.14,1136
  Bottom Layer w10: v1(340,950) 362.6,972.6 VR2.3 362.6,1111.17 ; v1(387,1136) 362.6,1111.6 362.6,1111.17 ; T2.8 518.39,379.02 490,350.63 C11.2 150,350.63 39,461.63 39,890 67,918 152,918 180,890 v1(180,850.41) C8.2 180,796.41 627.04,349.37 R15.1 760,319 770,309 805,309 884,230 1009,230 1029,250 1029,310.37 990,349.37 R14.1 ; U1.23 636.61,1193.39 660.63,1169.37 C2.2 v1(600.57,1138.57) 390,1138.57 362.6,1111.17 ; U1.13 990.94,1259.05 1069.37,1180.63 C1.2 1071.94,1136 v1(1124,1136)
pads on no net: J1.5 J1.6 J1.8 J1.9 J1.10 T1.1 T1.2 T2.3 U1.26
copper on no net: | length 6941.6
  Top Layer w5: 1350,50 1400,50 1400,100 1350,100 1350,50
  Top Layer w10: v2(240,220) 312.91,220 ; 494.02,362.75 557.25,362.75 v2(560,360) ; 790,250 800,250 900,150 1270,150 1380,260 ; 990,250 990,260 1088.42,358.42 1269.76,358.42 ; 1269.76,260 1300,290.24 v2(1300,310) ; v2(1320,540) 1320,418.42 1380,358.42
  Internal Layer 2 w5: 1450,50 1450,100 1500,100 1500,50 1450,50
  Internal Layer 1 w5: 1400,50 1450,50 1450,100 1400,100 1400,50
  Bottom Layer w5: 1500,50 1550,50 1550,100 1500,100 1500,50
  Bottom Layer w10: 75.2,880 310,645.2 310,500 330,480 475.2,480 705.2,250 790,250 ; 75.2,1080 425.2,730 540,730 570,700 570,600 920,250 990,250 ; 450,980 v2(510,980) ; 450,1080 480,1050 660.63,1050 ; v2(1290,1130) 1340.63,1130 ; v2(1300,310) 1350,360 1350,857.57 1270,937.57 1270,969.37 1340.63,1040 ; v2(1320,540) 1270,540 1255,555 1255,1235 1260,1240 1337.77,1240 1340.63,1237.14 1340.63,1330 ; 1419.37,1040 1419.37,1130 v2(1480,1130) ; 1419.37,1237.14 v2(1477.14,1237.14) ; 1419.37,1430 1439.37,1410 v2(1470,1410)

## Polygon pours and split planes (outlines as drawn)
no net on Internal Layer 2 "GND" (solid, pour order 2): 20,1780 1630,1780 1630,20 20,20
no net on Internal Layer 1 "VDD" (solid, pour order 3): 20,1780 1630,1780 1630,20 20,20

## Keep-outs
Keep-Out Layer:
  the board outline again, w10

## Other copper
Top Layer:
  text "1" at 1370,110 h20
  text "R1" at 1360,60 h20
Internal Layer 2:
  pour cut-out: 1340,40 1560,40 1560,140 1340,140
  text "3" at 1480,110 h20
  text "R1" at 1490,60 h20
Internal Layer 1:
  pour cut-out: 1340,40 1560,40 1560,140 1340,140
  text "2" at 1420,110 h20
  text "R1" at 1410,60 h20
Bottom Layer:
  text "4" at 1540,110 h20
  text "R1" at 1540,60 h20

## Silkscreen, mask and mechanical layers (free items; w line width, h text height)
Top Overlay:
  drawing of 449 lines, arcs and shapes, not listed
  text "+3.3V" at 60,1550 h30
  text "PN:1107-PCB-01" at 640,1530 h20
  text "SN:" at 640,1480 h20
  text "GND" at 1500,810 h30
  text "R" at 1500,450 h60
  text "T" at 1520,200 h60
  text "GND" at 210,40 h30
Bottom Overlay:
  text "+3.3V" at 380,1660 h30
  text "GND" at 1220,780 h30
  text "GND" at 290,40 h30
Top Solder:
  rectangle: 1340,40 1560,140
Bottom Solder:
  rectangle: 1340,40 1560,140
Mechanical 13:
  drawing of 795 lines, arcs and shapes, not listed
  text "1" at -1598.66,6425 h70
  text "2" at 1152,6425 h70
  text "3" at 3897,6425 h70
  text "4" at 6648.01,6425 h70
  text "A" at -2875,5407 h70
  text "A" at 7925,5407 h70
  text "Material Construction and Stackup (overall finish: 0.062 +/- 0.005:" at 3150,3860 h60
  text "Layer" at 3200.38,3510 h60
  text "Name" at 3610.29,3510 h60
  text "Material" at 4660,3510 h60
  text "Thickness" at 5519.76,3510 h60
  text "Constant" at 6169.6,3510 h60
  text "Board Layer Stack" at 6739.46,3510 h60
  text "1" at 3200.38,3390 h60
  text "Top Overlay" at 3610.29,3390 h60
  text "B" at -2875,3282 h70
  text "B" at 7925,3282 h70
  text "2" at 3200.38,3270 h60
  text "Top Solder" at 3610.29,3270 h60
  text "Solder Resist" at 4660,3270 h60
  text "0.40mil" at 5519.76,3270 h60
  text "3.5" at 6169.6,3270 h60
  text "3" at 3200.38,3150 h60
  text "Top Layer" at 3610.29,3150 h60
  text "Copper" at 4660,3150 h60
  text "1.42mil" at 5519.76,3150 h60
  text "4" at 3200.38,3030 h60
  text "Dielectric 1" at 3610.29,3030 h60
  text "FR-4" at 4660,3030 h60
  text "10.00mil" at 5519.76,3030 h60
  text "4.2" at 6169.6,3030 h60
  text "5" at 3200.38,2910 h60
  text "Internal Layer 1" at 3610.29,2910 h60
  text "Copper" at 4660,2910 h60
  text "1.42mil" at 5519.76,2910 h60
  text "6" at 3200.38,2790 h60
  text "Dielectric 5" at 3610.29,2790 h60
  text "5.00mil" at 5519.76,2790 h60
  text "4.2" at 6169.6,2790 h60
  text "7" at 3200.38,2670 h60
  text "Internal Layer 2" at 3610.29,2670 h60
  text "Copper" at 4660,2670 h60
  text "1.42mil" at 5519.76,2670 h60
  text "8" at 3200.38,2550 h60
  text "Dielectric 4" at 3610.29,2550 h60
  text "10.00mil" at 5519.76,2550 h60
  text "4.2" at 6169.6,2550 h60
  text "9" at 3200.38,2430 h60
  text "Bottom Layer" at 3610.29,2430 h60
  text "Copper" at 4660,2430 h60
  text "1.42mil" at 5519.76,2430 h60
  text "10" at 3200.38,2310 h60
  text "Bottom Solder" at 3610.29,2310 h60
  text "Solder Resist" at 4660,2310 h60
  text "0.40mil" at 5519.76,2310 h60
  text "3.5" at 6169.6,2310 h60
  text "11" at 3200.38,2190 h60
  text "Bottom Overlay" at 3610.29,2190 h60
  text "Hole Schedule:" at 3120,1570 h60
  text "C" at -2875,1157 h70
  text "C" at 7925,1157 h70
  text "1800 (mil)" at 1685.99,624.08 h60 r90
  text "1650 (mil)" at 559.08,-35.99 h60
  text "ENGINEER:" at 3400,-640 h45
  text "TITLE:" at 4900,-640 h45
  text "Amir Yousefi" at 3590,-760 h70
  text "On Off Sensor Light" at 5090,-870 h70
  text "PCB DESIGNER:" at 3400,-935 h45
  text "D" at -2875,-963 h70
  text "D" at 7925,-963 h70
  text "Proprietary and confidential. The information contained" at 1960,-1210 h35
  text "DATE:" at 3400,-1240 h45
  text "PART NO.:" at 4900,-1240 h45
  text "REV:" at 7000,-1240 h45
  text "in this drawing is the sole property of AYSS Technology." at 1960,-1280 h35
  text "Any production in part or as a whole without the written" at 1960,-1350 h35
  text "1107-PCB-01" at 5260,-1350 h70
  text "01" at 7150,-1350 h70
  text "March 09, 2017" at 3450,-1360 h70
  text "permission of AYSS Technology is prohibited." at 1960,-1410 h35
  text "Dimensions are in inches unless otherwise specified" at 1960,-1490 h35
  text "FILE NAME:" at 3400,-1540 h45
  text "PAPER SIZE:" at 4900,-1540 h45
  text "SCALE:" at 7000,-1540 h45
  text "Tolerance: .XXX +/-0.005" at 1960,-1550 h35
  text ".XX  +/-0.01" at 2220,-1610 h35
  text "1107-PCB-01-R1" at 3450,-1660 h70
  text "1:1" at 7170,-1660 h70
  text "1" at -1598.66,-1875 h70
  text "2" at 1152,-1875 h70
  text "3" at 3897,-1875 h70
  text "4" at 6648.01,-1875 h70
Drill Drawing:
  circle w10: c3210.62,705.83 r33.33
  lines w10: 3177.29,822.5 3243.96,822.5 3243.96,889.17 3177.29,889.17 3177.29,822.5 ; 3177.29,972.5 3243.96,972.5 3243.96,1039.17 3177.29,1039.17 3177.29,972.5 ; 3177.29,1155.83 3210.62,1122.5 3243.96,1155.83 3210.62,1189.17 3177.29,1155.83 ; 3177.29,1272.5 3177.29,1289.17 3193.96,1305.83 3177.29,1322.5 3177.29,1339.17 3193.96,1339.17 3210.62,1322.5 3227.29,1339.17 3243.96,1339.17 3243.96,1322.5 3227.29,1305.83 3243.96,1289.17 3243.96,1272.5 3227.29,1272.5 3210.62,1289.17 3193.96,1272.5 3177.29,1272.5 ; 3190.62,835.83 3230.62,835.83 3230.62,875.83 3190.62,875.83 3190.62,835.83
  lines w15: 3117.5,627.5 6996.47,627.5 ; 3117.5,1377.5 6996.47,1377.5 ; 3668.38,477.5 3668.38,1527.5 ; 4366.19,477.5 4366.19,1527.5 ; 5711.79,477.5 5711.79,1527.5 ; 6217.67,477.5 6217.67,1527.5 ; 3117.5,477.5 6996.47,477.5 6996.47,1527.5 3117.5,1527.5 3117.5,477.5
  text "Symbol" at 3207.5,1422.5 h72
  text "Hit Count" at 3713.38,1422.5 h72
  text "Finished Hole Size" at 4411.19,1422.5 h72
  text "Plated" at 5756.79,1422.5 h72
  text "Hole Type" at 6262.67,1422.5 h72
  text "2" at 3713.38,1272.5 h60
  text "35.43mil" at 4411.19,1272.5 h60
  text "PTH" at 5756.79,1272.5 h60
  text "Round" at 6262.67,1272.5 h60
  text "3" at 3713.38,1122.5 h60
  text "120.00mil" at 4411.19,1122.5 h60
  text "PTH" at 5756.79,1122.5 h60
  text "Round" at 6262.67,1122.5 h60
  text "4" at 3713.38,972.5 h60
  text "43.31mil" at 4411.19,972.5 h60
  text "PTH" at 5756.79,972.5 h60
  text "Round" at 6262.67,972.5 h60
  text "9" at 3713.38,822.5 h60
  text "10.00mil" at 4411.19,822.5 h60
  text "PTH" at 5756.79,822.5 h60
  text "Round" at 6262.67,822.5 h60
  text "25" at 3713.38,672.5 h60
  text "15.60mil" at 4411.19,672.5 h60
  text "PTH" at 5756.79,672.5 h60
  text "Round" at 6262.67,672.5 h60
  text "43 Total" at 3713.38,522.5 h60

## Text inside footprints (layer, text, board x,y; h text height)
J1: Top Overlay "2." at 1589,1698 h39.37 r90; Top Overlay "1." at 1324,1704 h39.37 r90; Top Overlay "10." at 1588,1349 h39.37 r90; Top Overlay "9." at 1332,1363 h39.37 r90